# Altium PCB NEW_PCB_2022-06-12-2.pcbdoc
Units mm, origin at the board's own origin, x right, y up, seen from the top; angles counter-clockwise.
Board outline 35.94 x 35.11 mm, 2 copper layers (Top Layer, Bottom Layer); 1 components, 0 nets, 32 pads, 0 vias.
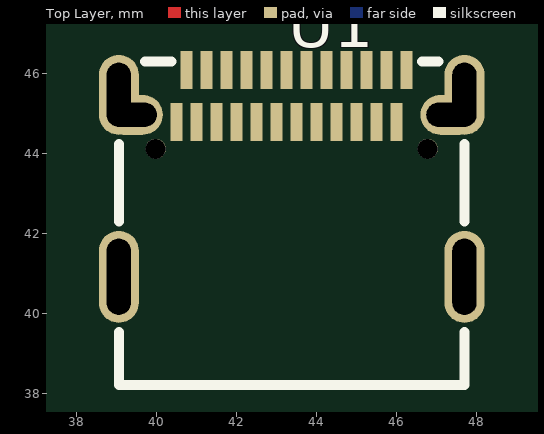
[diagram p0: Top Layer view]
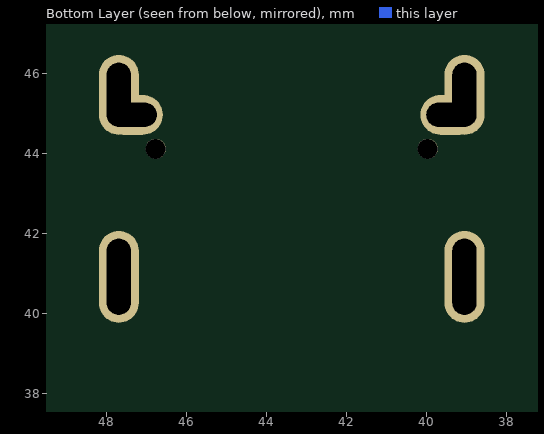
[diagram p1: Bottom Layer view, seen from below]

## Layer stack, top to bottom
Top Layer: signal copper (thickness not stored)
Dielectric: dielectric 0.32, FR-4, Dk 4.8
Bottom Layer: signal copper (thickness not stored)

## Board outline
61.34,25.4 25.4,25.4 25.4,60.507 61.34,60.507

## Components (designator, comment, footprint, x,y, rotation, side; value= is the part's Value field where it differs from the comment)
U1 "USB-C-SMD_TYPE-C-24P-QT" USB-C-SMD_TYPE-C-24P-QT 43.37,43.514 r0 top

## Footprints (in the part's own frame and the unit in brackets; to place one, negate y for a bottom-side part, rotate by r counter-clockwise, add the part's x,y. Pads: shape width x height; smd on the part's side, far side on the other; paste and mask are expansions set on the pad)
USB-C-SMD_TYPE-C-24P-QT [mm]
  oval 1x2 hole 0.6 slot 1.6 at 90 deg: 1(-4.32,1.963) 2(4.32,1.963)
  oval 1.5x1 hole 0.6 slot 1.2 at 0 deg: 1(-3.97,1.463) 2(3.97,1.463)
  oval 1x2.3 hole 0.6 slot 1.9 at 90 deg: 3(4.32,-2.587) 4(-4.32,-2.587)
  rect 0.3x0.95 smd: A1(-2.625,2.588) A2(-2.125,2.588) A3(-1.625,2.588) A4(-1.125,2.588) A5(-0.625,2.588) A6(-0.125,2.588) A7(0.375,2.588) A8(0.875,2.588) A9(1.375,2.588) A10(1.875,2.588) A11(2.375,2.588) A12(2.875,2.588) B1(2.625,1.288) B2(2.125,1.288) B3(1.625,1.288) B4(1.125,1.288) B5(0.625,1.288) B6(0.125,1.288) B7(-0.375,1.288) B8(-0.875,1.288) B9(-1.375,1.288) B10(-1.875,1.288) B11(-2.375,1.288) B12(-2.875,1.288)
  round 0.5 hole 0.5 unplated: ""(-3.4,0.613) ""(3.4,0.613)
  silkscreen extent -4.32,-5.29 4.32,2.79

## Nets (pads, with @x,y where several pads share a name; then routed paths per layer and width w, separated by ;. In a path a pad name is that pad's centre, name@x,y a point inside that pad or via, vN(x,y) a via of type N, cw(c..) or ccw(c..) an arc to the next point about the centre after c; other vN are vias at no path point)
pads on no net: U1. U1.1 U1.2 U1.3 U1.4 U1.A1 U1.A2 U1.A3 U1.A4 U1.A5 U1.A6 U1.A7 U1.A8 U1.A9 U1.A10 U1.A11 U1.A12 U1.B1 U1.B2 U1.B3 U1.B4 U1.B5 U1.B6 U1.B7 U1.B8 U1.B9 U1.B10 U1.B11 U1.B12